# Altium PCB BB_H11L1_TXRX.PcbDoc
Units mil, origin at the board's own origin, x right, y up, seen from the top; angles counter-clockwise.
Board outline 1200 x 905.51 mil, 2 copper layers (Top Layer, Bottom Layer); 14 components, 12 nets, 42 pads, 18 vias.
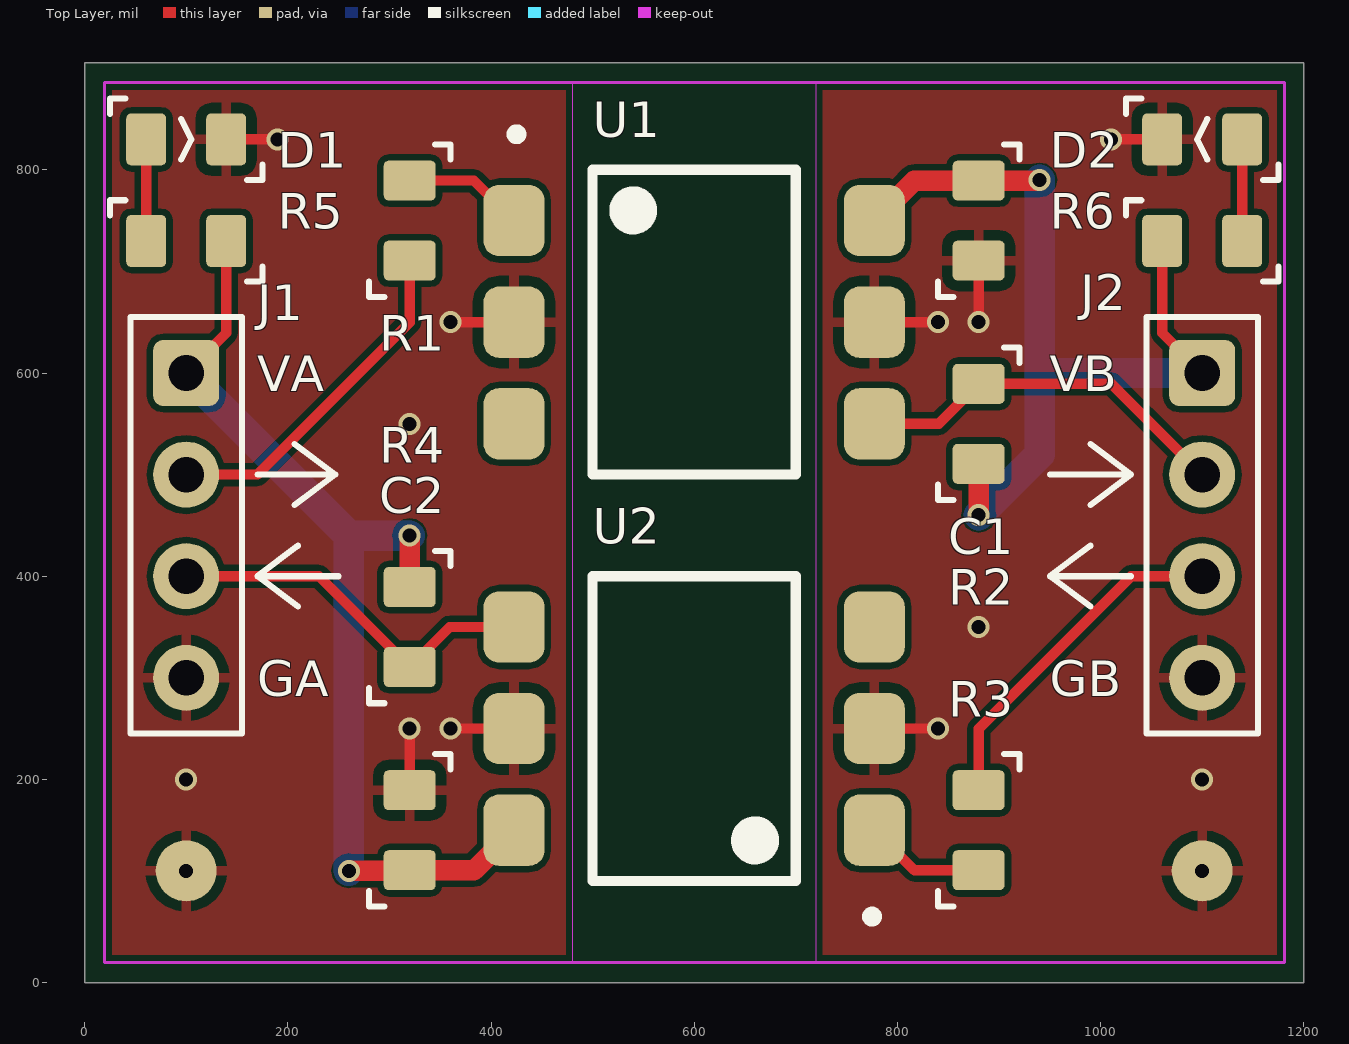
[diagram p0: Top Layer view]
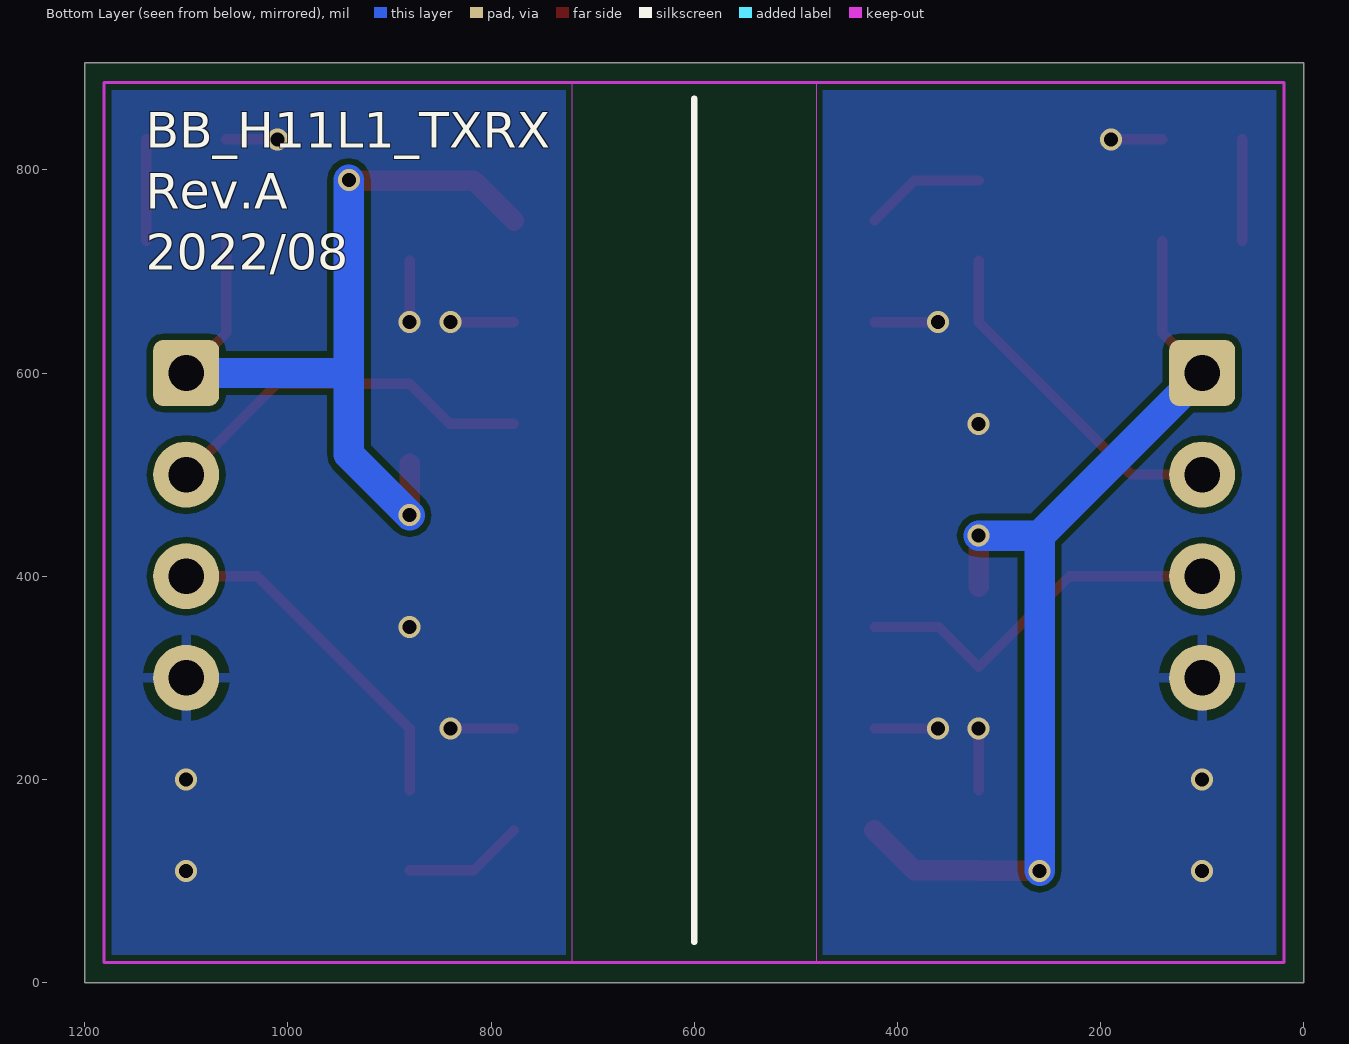
[diagram p1: Bottom Layer view, seen from below]
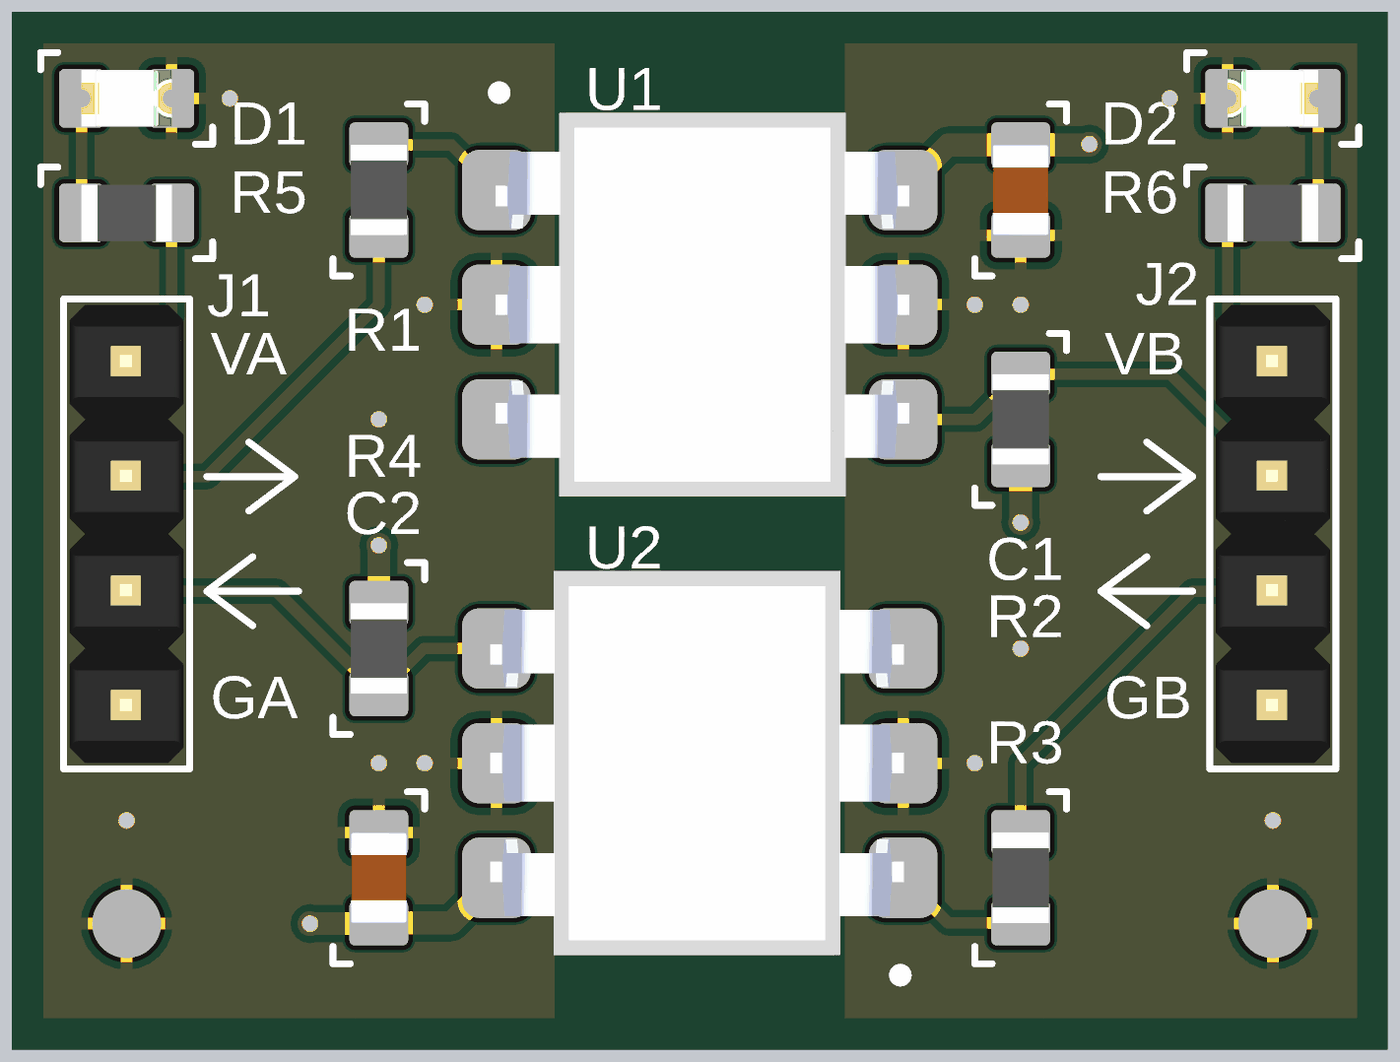
[diagram p2: 3D render of the assembled board from above, using the file's embedded part models]

## Layer stack, top to bottom
Top Solder: solder mask 0.4, Solder Resist, Dk 3.5
Top Layer: signal copper 1.4
Dielectric 1: dielectric 12.6, FR-4, Dk 4.8
Bottom Layer: signal copper 1.4
Bottom Solder: solder mask 0.4, Solder Resist, Dk 3.5

## Board outline
0,0 1200,0 1200,905.51 0,905.51

## Design rules (kind name [scope] priority, off if disabled: settings)
Clearance [All] p1: gap=6 ignorepadtopadclearanceinfootprint=FALSE
PolygonConnect [All] p1: thpad.connectstyle=Relief thpad.reliefconductorwidth=10 thpad.reliefentries=4 thpad.polygonreliefangle="90 Angle" thpad.airgapwidth=10 smdpad.connectstyle=Relief smdpad.reliefconductorwidth=10 smdpad.reliefentries=4 smdpad.polygonreliefangle="90 Angle" smdpad.airgapwidth=10 via.connectstyle=Direct via.reliefconductorwidth=10 via.reliefentries=4 via.polygonreliefangle="90 Angle" via.airgapwidth=10
RoutingVias [All] p1: holewidth=28 width=50 viastyle="Through Hole" minholewidth=28 minwidth=50 maxholewidth=28 maxwidth=50
SolderMaskExpansion [All] p1: expansion=4
UnRoutedNet [All] p1: checkbadconnections=TRUE
Width [All] p1: maxlimit=30 minlimit=6 preferedwidth=10
29 further rules are at their usual default settings.

## Components (designator, comment, footprint, x,y, rotation, side; value= is the part's Value field where it differs from the comment)
C1 "100n" 0805C_RF_M 880,750 r90 top
C2 "100n" 0805C_RF_M 320,150 r270 top
D1 "Unspecified" 0805LED_RF_M 100,830 r180 top
D2 "Unspecified" 0805LED_RF_M 1100,830 r0 top
J1 "PINHDR-4P1" HEADER-2.54-4P1 100,450 r270 top
J2 "PINHDR-4P1" HEADER-2.54-4P1 1100,450 r270 top
R1 "300R" 0805R_RF_M 320,750 r90 top
R2 "5K1" 0805R_RF_M 880,550 r270 top
R3 "300R" 0805R_RF_M 880,150 r90 top
R4 "5K1" 0805R_RF_M 320,350 r90 top
R5 "1K" 0805R_RF_M 100,730 r0 top
R6 "1K" 0805R_RF_M 1100,730 r180 top
U1 "H11L1SR2M" H11L1SR2M_SMD-6 600,650 r270 top
U2 "H11L1SR2M" H11L1SR2M_SMD-6 600,250 r90 top

## Footprints (in the part's own frame and the unit in brackets; to place one, negate y for a bottom-side part, rotate by r counter-clockwise, add the part's x,y. Pads: shape width x height; smd on the part's side, far side on the other; paste and mask are expansions set on the pad)
0805C_RF_M [mm] "Chip Capacitor 0805 Reflow Medium"
  rrect25% 1x1.3 smd: 1(-1,0) 2(1,0)
  silkscreen extent -1.91,-1.02 1.91,1.02, body extent -1,-0.62 1.01,0.63, height 0.94
0805LED_RF_M [mm] "Chip LED 0805 Reflow Medium"
  rrect25% 1x1.3 smd: A(1,0) C(-1,0)
  silkscreen extent -1.91,-1.02 1.91,1.02, body extent -1,-0.62 1,0.63, height 0.7
0805R_RF_M [mm] "Chip Resistor 0805 Reflow Medium"
  rrect25% 1x1.3 smd: 1(-1,0) 2(1,0)
  silkscreen extent -1.91,-1.02 1.91,1.02, body extent -1,-0.62 1,0.63, height 0.6
H11L1SR2M_SMD-6 [mm] "SMD-6 OPTOISO"
  rrect50% 1.78x1.52 smd: 1(-2.54,-4.505) 2(0,-4.505) 3(2.54,-4.505) 4(2.54,4.505) 5(0,4.505) 6(-2.54,4.505)
  silkscreen extent -4.82,-4.57 3.81,2.54, body extent -4.25,-4.52 4.26,4.64, height 5.06
HEADER-2.54-4P1 [mil] "Pin Header Single Row 4 Positions Pitch 2.54 mm"
  rrect30% 65x65 hole 35: 1(-150,0)
  round 65 hole 35: 2(-50,0) 3(50,0) 4(150,0)
  silkscreen extent -205,-55 205,55, body extent -200,-50 200,50, height 362

## Part data
C1 C2: library part C, "Capacitor", Manufacturer="Generic Brand", Max Voltage="? V", Tolerance=?, Category=Capacitor, Mounting Technology=SMT, Supplier Link=http://
D1 D2: library part LED, "LED", Forward Voltage Drop="? V", Manufacturer="Generic Brand", Category=Diode, Emitting Color=Unspecified, Mounting Technology=SMT, Supplier Link=http://
J1 J2: "Generic Pin Header 4x1"
R1 R2 R3 R4 R5 R6: library part R, "Resistor", Manufacturer="Generic Brand", Max Voltage="? V", Power Rating="? W", Tolerance=?, Category=Resistor, Mounting Technology=SMT, Supplier Link=http://
U1 U2: "OPTOISO 4.17KV OPN COLL SMD-6", Alternative Supplier Part No=753715628, Manufacturer="ON Semiconductor", Package=SMD-6, Supplier Part No=H11L1SR2MCT-ND, Alternative Supplier=Chipdip, Alternative Supplier Link=https://www.chipdip.by/product/h11l1sr2m, Manufacturer Part No=H11L1SR2M, Mounting Type=SMT, Supplier=DigiKey, Supplier URL=https://www.digikey.com/en/products/detail/on-semiconductor/H11L1SR2M/458856

## Free pads (board coordinates)
  round 60 smd: SPARE(100,110) SPARE(1100,110)

## Via types
v1: diameter 21.65, hole 13.78, Top Layer to Bottom Layer, tented both sides, 18 vias

## Nets (pads, with @x,y where several pads share a name; then routed paths per layer and width w, separated by ;. In a path a pad name is that pad's centre, name@x,y a point inside that pad or via, vN(x,y) a via of type N, cw(c..) or ccw(c..) an arc to the next point about the centre after c; other vN are vias at no path point)
GND: C2.1 D1.C J1.4 pad.SPARE@100,110 U1.2 U2.5 | length 236.5
  Top Layer w10: D1.C v1(190,830) ; C2.1 v1(320,250) ; v1(360,250) U2.5 ; v1(360,650) U1.2
  other v1: 100,110 100,200 320,550
GND_ISO: C1.1 D2.C J2.4 pad.SPARE@1100,110 U1.5 U2.2 | length 236.5
  Top Layer w10: U2.2 v1(840,250) ; U1.5 v1(840,650) ; v1(880,650) C1.1 ; v1(1010,830) D2.C
  other v1: 1100,110 1100,200 880,350
NetD1_A: D1.A R5.1 | length 100
  Top Layer w10: R5.1 D1.A
NetD2_A: D2.A R6.1 | length 100
  Top Layer w10: R6.1 D2.A
NetR1_2: R1.2 U1.1 | length 118.9
  Top Layer w10: R1.2 383.27,789.37 U1.1
NetR3_1: R3.1 U2.1 | length 118.9
  Top Layer w10: U2.1 816.73,110.63 R3.1
RX_ISO: J2.3 R3.2 | length 342.8
  Top Layer w10: R3.2 880,250 1030,400 J2.3
RX_MCU: J1.3 R4.1 U2.4 | length 376
  Top Layer w10: J1.3 230.63,400 R4.1 359.37,350 U2.4
TX_ISO: J2.2 R2.1 U1.4 | length 376
  Top Layer w10: U1.4 840.63,550 R2.1 1010.63,589.37 J2.2
TX_MCU: J1.2 R1.1 | length 342.8
  Top Layer w10: J1.2 170,500 320,650 R1.1
VDD: C2.2 J1.1 R4.2 R5.2 U2.6 | length 992.4
  Top Layer w10: J1.1 139.37,639.37 R5.2
  Top Layer w20: v1(260,110) 319.37,110 C2.2 383.27,110.63 U2.6 ; R4.2 v1(320,440)
  Bottom Layer w30: J1.1 260,440 ; v1(260,110) 260,440 ; v1(320,440) 260,440
VDD_ISO: C1.2 J2.1 R2.2 R6.2 U1.6 | length 891
  Top Layer w10: R6.2 1060.63,639.37 J2.1
  Top Layer w20: U1.6 816.73,789.37 C1.2 939.37,789.37 v1(940,790) ; v1(880,460) R2.2
  Bottom Layer w30: v1(880,460) 940,520 940,600 ; v1(940,790) 940,600 ; J2.1 940,600
pads on no net: U1.3 U2.3

## Polygon pours and split planes (outlines as drawn)
GND on Bottom Layer "NONET_L-01_P-001" (solid, remove dead copper, pour order 0): 10,900 480,900 480,10 10,10
GND_ISO on Bottom Layer "NONET_L-01_P-001" (solid, remove dead copper, pour order 2): 1190,900 720,900 720,10 1190,10
GND on Top Layer "NONET_L-01_P-001" (solid, remove dead copper, pour order 6): 10,900 480,900 480,10 10,10
GND_ISO on Top Layer "NONET_L-01_P-001" (solid, remove dead copper, pour order 4): 720,900 1190,900 1190,10 720,10

## Keep-outs
Keep-Out Layer:
  rectangle: 480,19.68 720,885.83
  lines w3: 19.68,19.68 1181.1,19.68 1181.1,885.83 19.68,885.83 19.68,19.68

## Silkscreen, mask and mechanical layers (free items; w line width, h text height)
Top Overlay:
  lines w6: 170,500 246.67,500 ; 206.67,470 246.67,500 ; 206.67,530 246.67,500 ; 210,370 170,400 ; 210,430 170,400 ; 250,400 170,400 ; 950,500 1030,500 ; 990,370 950,400 ; 990,430 950,400 ; 990,470 1030,500 ; 990,530 1030,500 ; 1030,400 950,400
  text "VA" at 170,570 h60
  text "VB" at 950,570 h60
  text "GA" at 170,270 h60
  text "GB" at 950,270 h60
Bottom Overlay:
  lines w6: 600,40 600,870
  text "BB_H11L1_TXRX" at 1140,810 h60
  text "Rev.A" at 1140,750 h60
  text "2022/08" at 1140,690 h60
Mechanical 1:
  the board outline again, w3